# EAGLE board pic (EAGLE 5.01)
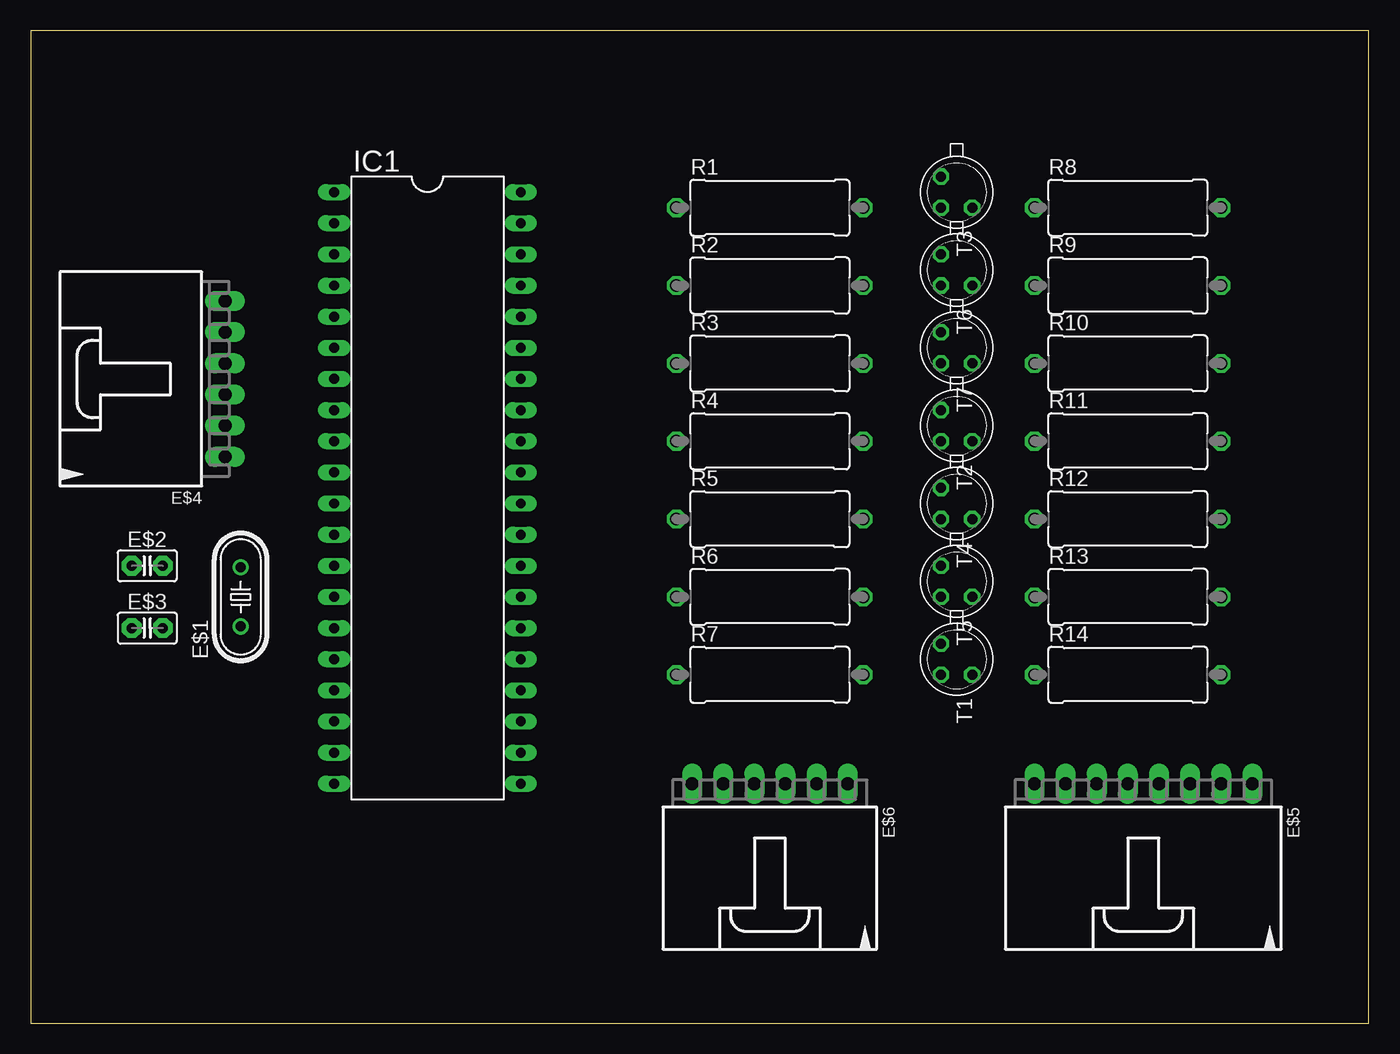
[diagram p0: board, top side]
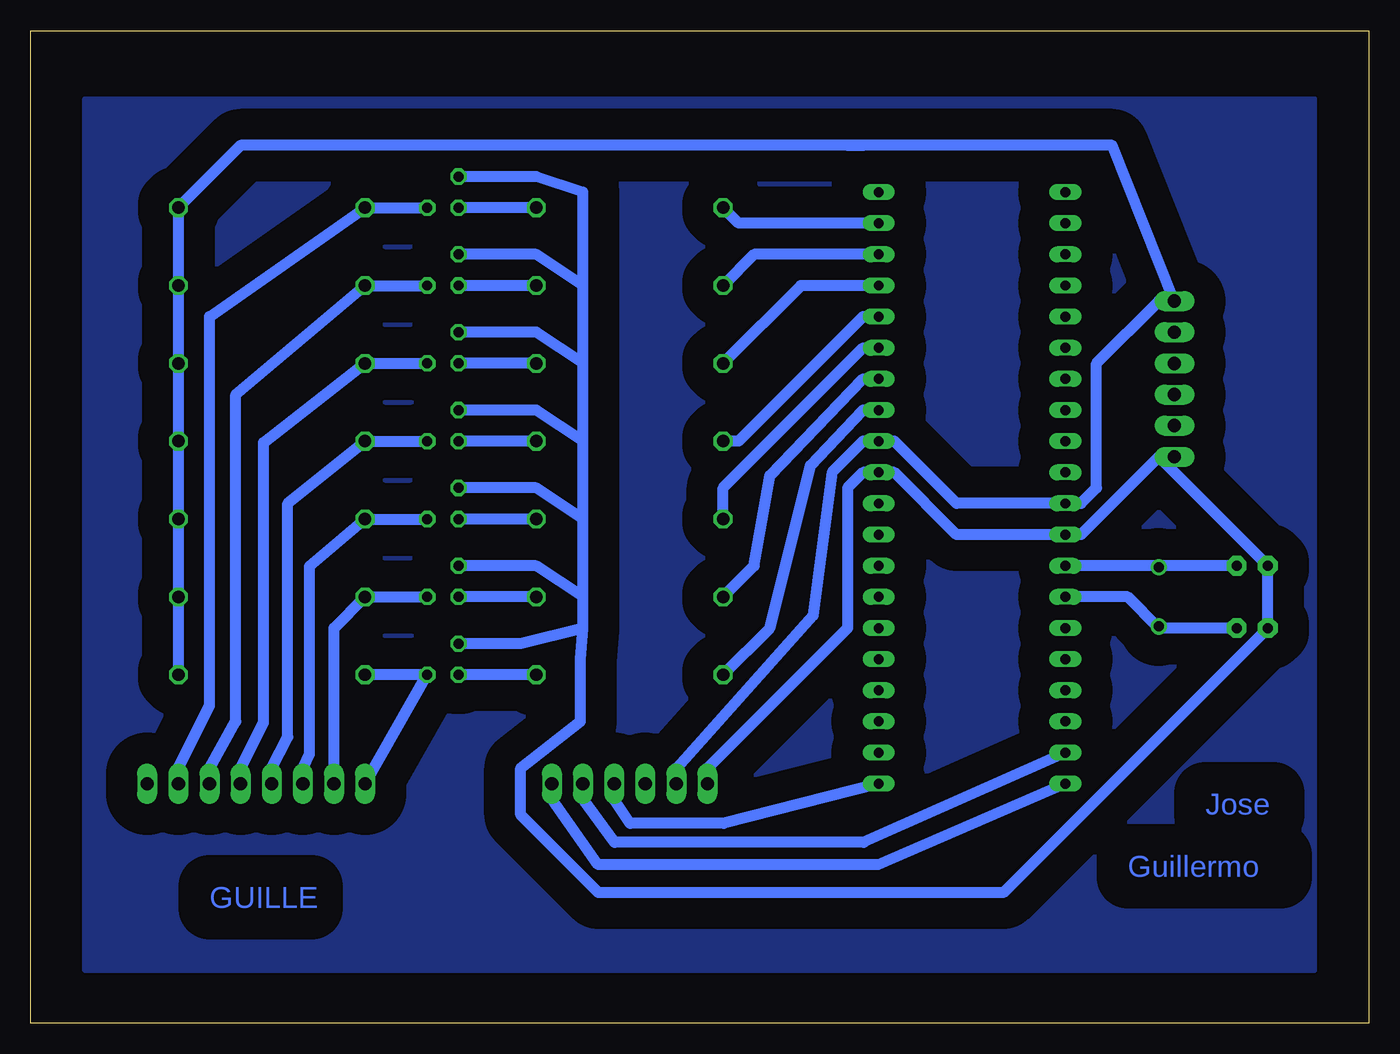
[diagram p1: board, bottom side, seen from below]

Size 109.2 x 80.95 mm. Coordinates in mm from the lower left corner, seen from the top.
Outline: 0,0 109.2,0 109.2,80.95 0,80.95 0,0
Copper layers (1*16): Top 0.035mm / dielectric 1.5mm / Bottom 0.035mm
Design rules "default *": minimum track width 35mil, minimum drill 24mil, track to track 12mil, track to pad 8mil, pad to pad 8mil, via to via 8mil, smd to smd 8mil, copper to edge 40mil, drill to drill 8mil, minimum pad ring 10mil, minimum via ring 8mil, stop-mask expansion 4mil, vias tented up to drill 0mil, thermal gap 10mil

## Footprints (pad centres in the part's own frame; a part is rotated, then mirrored left to right if it is on the bottom)
HC49/S = drill 0.813 round: 1 -2.413,0; 2 2.413,0
C2.5-2 = drill 0.813 pad 1.6 octagon: 1 -1.27,0; 2 1.27,0
70553-06 = drill 1.092 long: 1 -6.35,-7.62; 2 -3.81,-7.62; 3 -1.27,-7.62; 4 1.27,-7.62; 5 3.81,-7.62; 6 6.35,-7.62
70553-08 = drill 1.092 long: 1 -8.89,-7.62; 2 -6.35,-7.62; 3 -3.81,-7.62; 4 -1.27,-7.62; 5 1.27,-7.62; 6 3.81,-7.62; 7 6.35,-7.62; 8 8.89,-7.62
DIL40 = drill 0.813 long: 1 -24.13,-7.62; 2 -21.59,-7.62; 3 -19.05,-7.62; 4 -16.51,-7.62; 5 -13.97,-7.62; 6 -11.43,-7.62; 7 -8.89,-7.62; 8 -6.35,-7.62; 9 -3.81,-7.62; 10 -1.27,-7.62; 11 1.27,-7.62; 12 3.81,-7.62; 13 6.35,-7.62; 14 8.89,-7.62; 15 11.43,-7.62; 16 13.97,-7.62; 17 16.51,-7.62; 18 19.05,-7.62; 19 21.59,-7.62; 20 24.13,-7.62; 21 24.13,7.62; 22 21.59,7.62; 23 19.05,7.62; 24 16.51,7.62; 25 13.97,7.62; 26 11.43,7.62; 27 8.89,7.62; 28 6.35,7.62; 29 3.81,7.62; 30 1.27,7.62; 31 -1.27,7.62; 32 -3.81,7.62; 33 -6.35,7.62; 34 -8.89,7.62; 35 -11.43,7.62; 36 -13.97,7.62; 37 -16.51,7.62; 38 -19.05,7.62; 39 -21.59,7.62; 40 -24.13,7.62
P0613/15 = drill 1.016 octagon: 1 -7.62,0; 2 7.62,0
TO18 = drill 0.813 octagon: 1 -1.27,-1.27; 2 1.27,-1.27; 3 1.27,1.27

## Placement (x,y rotation side)
E$1  [HC49/S]  17.14,34.76 90 top
E$2  [C2.5-2]  9.52,37.3 0 top
E$3  [C2.5-2]  9.52,32.22 0 top
E$4  [70553-06]  8.25,52.54 90 top
E$5  [70553-08]  90.8,11.9 180 top
E$6  [70553-06]  60.32,11.9 180 top
IC1  PIC16F877P  [DIL40]  32.38,43.65 270 top
R1  [P0613/15]  60.32,66.51 0 top
R2  [P0613/15]  60.32,60.16 0 top
R3  [P0613/15]  60.32,53.81 0 top
R4  [P0613/15]  60.32,47.46 0 top
R5  [P0613/15]  60.32,41.11 0 top
R6  [P0613/15]  60.32,34.76 0 top
R7  [P0613/15]  60.32,28.41 0 top
R8  [P0613/15]  89.53,66.51 0 top
R9  [P0613/15]  89.53,60.16 0 top
R10  [P0613/15]  89.53,53.81 0 top
R11  [P0613/15]  89.53,47.46 0 top
R12  [P0613/15]  89.53,41.11 0 top
R13  [P0613/15]  89.53,34.76 0 top
R14  [P0613/15]  89.53,28.41 0 top
T1  [TO18]  75.56,29.68 270 top
T2  [TO18]  75.56,48.73 270 top
T3  [TO18]  75.56,67.78 270 top
T4  [TO18]  75.56,42.38 270 top
T5  [TO18]  75.56,36.03 270 top
T6  [TO18]  75.56,61.43 270 top
T7  [TO18]  75.56,55.08 270 top

## Library data of the parts
E$1 = crystal
E$2 E$3 = capacitor-wima
E$4-E$6 = con-molex
IC1 = microchip
R1-R14 = resistor
T1-T7 = transistor

## Nets
S$1: R1.2 T3.2
S$2: R2.2 T6.2
S$3: R3.2 T7.2
S$4: R4.2 T2.2
S$5: R7.2 T1.2
S$6: R6.2 T5.2
S$7: R5.2 T4.2
S$8: E$5.2 R8.1 T3.3
S$9: E$5.3 R9.1 T6.3
S$10: E$5.4 R10.1 T7.3
S$11: E$5.5 R11.1 T2.3
S$12: E$5.6 R12.1 T4.3
S$13: E$5.7 R13.1 T5.3
S$14: E$5.8 R14.1 T1.3
S$16: IC1.39 R1.1
S$17: IC1.38 R2.1
S$18: IC1.37 R3.1
S$19: IC1.36 R4.1
S$20: IC1.35 R5.1
S$21: IC1.34 R6.1
S$22: IC1.33 R7.1
S$23: E$1.2 E$2.2 IC1.13
S$24: E$1.1 E$3.2 IC1.14
S$25: E$6.3 IC1.21
S$28: E$6.1 IC1.20
S$29: E$6.2 IC1.19
VDD: E$4.6 E$6.5 IC1.11 IC1.32 R8.2 R9.2 R10.2 R11.2 R12.2 R13.2 R14.2
VSS: E$2.1 E$3.1 E$4.1 E$6.6 IC1.12 IC1.31 T1.1 T2.1 T3.1 T4.1 T5.1 T6.1 T7.1

## Tracks (layer width: path | path; a pad name or v marks a point on that pad's centre or on a via)
S$1
  Bottom 0.889: R1.2 T3.2
S$2
  Bottom 0.889: R2.2 T6.2
S$3
  Bottom 0.889: R3.2 T7.2
S$4
  Bottom 0.889: R4.2 T2.2
S$5
  Bottom 0.889: R7.2 T1.2
S$6
  Bottom 0.889: R6.2 T5.2
S$7
  Bottom 0.889: R5.2 T4.2
S$8
  Bottom 0.889: T3.3 R8.1 94.61,57.62 94.61,25.87 97.15,20.79 E$5.2
S$9
  Bottom 0.889: T6.3 R9.1 92.46,51.27 92.46,24.6 94.61,20.79 E$5.3
S$10
  Bottom 0.889: T7.3 R10.1 90.2,47.35 90.2,24.49 92.07,20.79 E$5.4
S$11
  Bottom 0.889: T2.3 R11.1 88.22,42.38 88.22,23.33 89.53,20.79 E$5.5
S$12
  Bottom 0.889: T4.3 R12.1 86.45,37.24 86.45,22 86.99,20.79 E$5.6
S$13
  Bottom 0.889: T5.3 R13.1 84.45,32.22 E$5.7
S$14
  Bottom 0.889: T1.3 R14.1 T1.3 | E$5.8 T1.3
S$15
  pour Bottom (isolate 2.54): 104.77,75.4 4.44,75.4 4.44,4.28 104.77,4.28
S$16
  Bottom 0.889: R1.1 51.43,65.24 IC1.39
S$17
  Bottom 0.889: R2.1 50.16,62.7 IC1.38
S$18
  Bottom 0.889: R3.1 46.35,60.16 IC1.37
S$19
  Bottom 0.889: R4.1 51.43,47.46 41.27,57.62 IC1.36
S$20
  Bottom 0.889: R5.1 52.7,43.65 41.27,55.08 IC1.35
S$21
  Bottom 0.889: R6.1 50.16,37.3 48.87,44.66 41.27,52.54 IC1.34
S$22
  Bottom 0.889: R7.1 48.89,32.22 45.58,45.46 41.27,50 IC1.33
S$23
  Bottom 0.889: E$2.2 17.14,37.3 | 17.14,37.3 IC1.13 | 17.14,37.3 E$1.2
S$24
  Bottom 0.889: E$3.2 17.14,32.22 | 17.14,32.22 19.68,34.76 IC1.14 | 17.14,32.22 E$1.1
S$25
  Bottom 0.889: IC1.21 52.66,16.28 60.28,16.28 61.59,18.25 E$6.3
S$28
  Bottom 0.889: IC1.20 40.04,12.92 62.9,12.92 66.67,18.25 E$6.1
S$29
  Bottom 0.889: IC1.19 41.23,14.74 61.55,14.74 64.13,18.25 E$6.2
VDD
  Bottom 0.889: R14.2 R13.2 R12.2 R11.2 R10.2 R9.2 R8.2 92.07,71.59 42.54,71.59 | 42.54,71.59 41.27,71.59 | E$6.5 56.51,20.79 45.35,33.26 43.81,44.92 41.27,47.46 IC1.32 38.73,47.46 33.65,42.38 IC1.11 23.49,42.38 22.22,43.65 22.22,53.81 17.14,58.89 E$4.6 20.95,71.59 42.54,71.59
VSS
  Bottom 0.889: E$6.6 53.97,20.79 42.54,32.22 42.54,43.65 41.27,44.92 IC1.31 38.73,44.92 33.65,39.84 IC1.12 23.49,39.84 17.14,46.19 | 17.14,46.19 E$2.1 E$3.1 29.84,10.63 62.86,10.63 69.21,16.98 69.21,20.79 64.33,24.6 64.33,29.68 64.13,32.22 | 17.14,46.19 E$4.1 | T1.1 69.21,30.95 64.13,32.22 | 64.13,32.22 64.13,34.76 | 64.13,34.76 67.94,37.3 T5.1 | T4.1 67.94,43.65 64.13,41.11 | 64.13,34.76 64.13,41.11 | T2.1 67.94,50 64.13,47.46 | 64.13,41.11 64.13,47.46 | T7.1 67.94,56.35 64.13,53.81 | 64.13,47.46 64.13,53.81 | T6.1 67.94,62.7 64.13,60.16 | 64.13,53.81 64.13,60.16 | T3.1 67.94,69.05 64.13,67.78 64.13,60.16

## Text on the board
Bottom: Jose | Guillermo | GUILLE